# Altium PCB PCB1.PcbDoc
Units mil, origin at the board's own origin, x right, y up, seen from the top; angles counter-clockwise.
Board outline 6000 x 4000 mil, 2 copper layers (Top Layer, Bottom Layer); 36 components, 23 nets, 159 pads, 0 vias.
Unrouted connection lines stored in the file: 87.
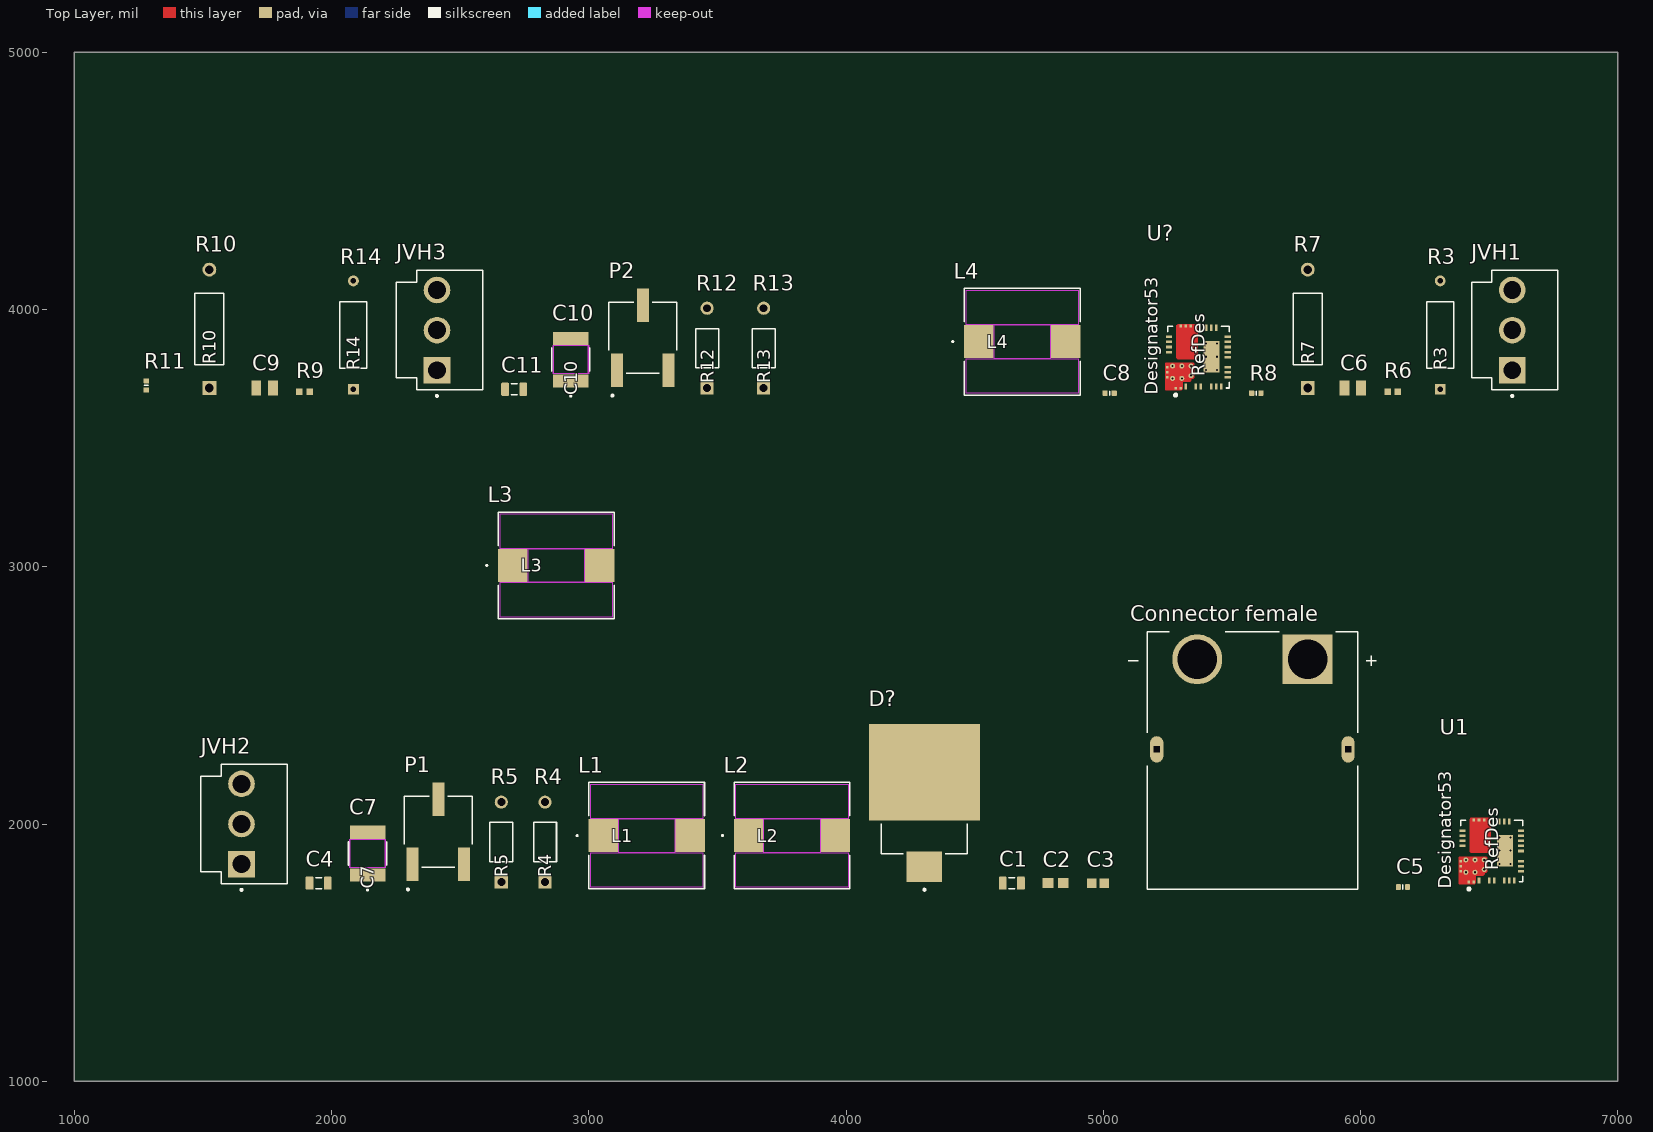
[diagram p0: Top Layer view]
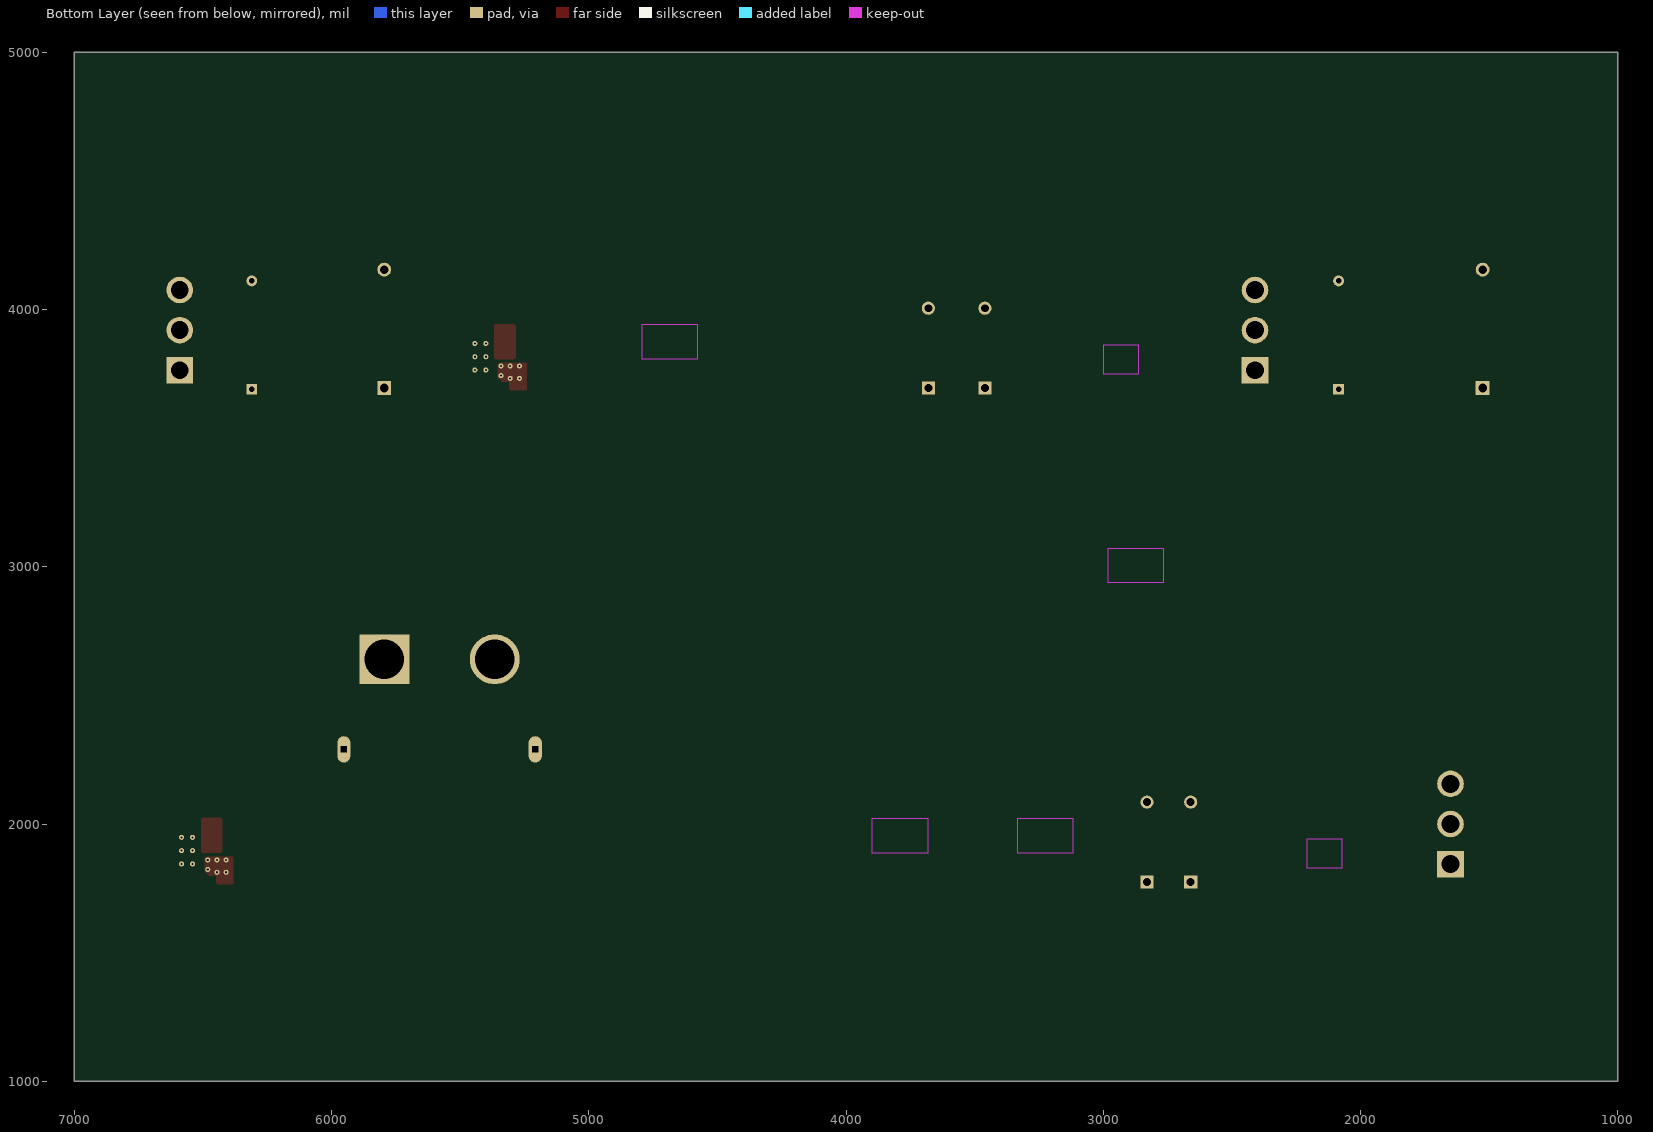
[diagram p1: Bottom Layer view, seen from below]

## Layer stack, top to bottom
Top Solder: solder mask 0.4, Solder Resist, Dk 3.5
Top Layer: signal copper 1.4
Dielectric 1: dielectric 12.6, FR-4, Dk 4.8
Bottom Layer: signal copper 1.4
Bottom Solder: solder mask 0.4, Solder Resist, Dk 3.5

## Board outline
1000,1000 7000,1000 7000,5000 1000,5000

## Design rules (kind name [scope] priority, off if disabled: settings)
Clearance [All] p1: gap=0.25 ignorepadtopadclearanceinfootprint=FALSE
PolygonConnect [All] p1: connectstyle=Relief reliefconductorwidth=10 reliefentries=4 polygonreliefangle="90 Angle" airgapwidth=10
RoutingVias [All] p1: holewidth=28 width=50 viastyle="Through Hole" minholewidth=28 minwidth=50 maxholewidth=28 maxwidth=50
SolderMaskExpansion [All] p1: expansion=4 istentingtop=FALSE
SupplyNets "Schematic Supply Nets" [InNet('GND')] p1: voltage=0.000
Width [All] p1: maxlimit=10 minlimit=10 preferedwidth=10
30 further rules are at their usual default settings.

## Components (designator, comment, footprint, x,y, rotation, side; value= is the part's Value field where it differs from the comment)
C1 "Capacitor 22µF +/-40% 16V 0805" CAPC0805(2012)145_L 4645,1770 r0 top value=22µF
C2 "Capacitor 1 uF +/- 10% 16 V 0603" CAPC1608X94X35NL15T15 4815,1770 r0 top value=1µF
C3 "Capacitor 100 nF +/-10% 50 V 0603" CAPC1608X90X40NL10T20 4980,1770 r0 top value=100nF
C4 "Capacitor 4.7µF +/-40% 25V 0805" CAPC0805(2012)145_L 1950,1770 r0 top value=4.7µF
C5 "Capacitor 47nF +/-20% 50V 0402" CAPC0402(1005)60_L 6165,1755 r0 top value=47nF
C6 "0.1uF" CAPC2012X145N 5970,3695 r0 top
C7 "9.3 uF" CAP_1812C_X7R_2S_50V_KEM 2140,1885 r90 top
C8 "Capacitor 47nF +/-20% 50V 0402" CAPC0402(1005)60_L 5025,3675 r0 top value=47nF
C9 "0.1uF" CAPC2012X145N 1740,3695 r0 top
C10 "9.3 uF" CAP_1812C_X7R_2S_50V_KEM 2930,3805 r90 top
C11 "Capacitor 4.7µF +/-40% 25V 0805" CAPC0805(2012)145_L 2710,3690 r0 top value=4.7µF
"Connector female" "XT90F-PW" AMASS_XT90PW-F 5580,2290 r0 top
D? "58.1 V 2800 W" TVSP_TLD8S36AH 4305,2150 r90 top
JVH1 "JST_VH-F" JST_B3P-VH(LF)(SN) 6590,3920 r90 top
JVH2 "JST_VH-F" JST_B3P-VH(LF)(SN) 1650,2000 r90 top
JVH3 "JST_VH-F" JST_B3P-VH(LF)(SN) 2410,3920 r90 top
L1 "6.8 uH" IND_IHLP-4040DZ_VIS 3225,1955 r0 top
L2 "6.8 uH" IND_IHLP-4040DZ_VIS 3790,1955 r0 top
L3 "6.8 uH" IND_IHLP-4040DZ_VIS 2873.5,3005 r0 top
L4 "6.8 uH" IND_IHLP-4040DZ_VIS 4685,3875 r0 top
P1 "50k" TRIM_3361P-1-503GLF 2415,1970 r90 top
P2 "50k" TRIM_3361P-1-503GLF 3210,3890 r90 top
R3 "6.81k" RES_MFR25_6P3X2P4_YAG 6310,3690 r90 top
R4 "27k" STA_CF18_STP 2830,1775 r90 top
R5 "0.008 k" STA_CF18_STP 2660,1775 r90 top
R6 "Resistor 100k +/-1% 0402 100 mW" RESC1005X40X25ML05T05 6125,3680 r0 top value=100k
R7 "41.2k" YAG_MF25_YAG 5795,3695 r90 top
R8 "Resistor 53K6 +/-1 % 0402 63 mW" RESC0402(1005)_L 5595,3675 r0 top value=53.6k
R9 "Resistor 100k +/-1% 0402 100 mW" RESC1005X40X25ML05T05 1895,3680 r0 top value=100k
R10 "41.2k" YAG_MF25_YAG 1525,3695 r90 top
R11 "Resistor 53K6 +/-1 % 0402 63 mW" RESC0402(1005)_L 1280,3705 r90 top value=53.6k
R12 "0.008 k" STA_CF18_STP 3460,3695 r90 top
R13 "27k" STA_CF18_STP 3680,3695 r90 top
R14 "6.81k" RES_MFR25_6P3X2P4_YAG 2085,3690 r90 top
U1 "LM70660RRXR" RRX0029B-MFG 6510,1895 r90 top
U? "LM70660RRXR" RRX0029B-MFG 5370,3815 r90 top

## Footprints (in the part's own frame and the unit in brackets; to place one, negate y for a bottom-side part, rotate by r counter-clockwise, add the part's x,y. Pads: shape width x height; smd on the part's side, far side on the other; paste and mask are expansions set on the pad)
AMASS_XT90PW-F [mm]
  round 4.916 hole 3.9: N(-5.45,8.9)
  rect 4.916x4.916 / inner round 4.916 / far side rect 4.916x4.916 hole 3.9: P(5.45,8.9)
  oval 1.3x2.6 hole 0.6 square: S1(9.45,0) S2(-9.45,0)
  silkscreen extent -12.25,-13.8 12.25,11.6, body extent -10.65,-13.8 10.65,11.6, height 10.3
CAP_1812C_X7R_2S_50V_KEM [mil]
  rect 51x138 smd paste+0 mask+0: 1(-83,0) 2(83,0)
  Top Layer keep-out region: -55.5,-67 -55.5,67 55.5,67 55.5,-67
  Keep-Out Layer region: -55.5,-69 -55.5,69 55.5,69 55.5,-69
  silkscreen extent -144,-74 45,74, body extent -94,-69 94,69, height 146
CAPC0402(1005)60_L [mm] "Chip Capacitor, Body 1.0x0.5mm, Height 0.6mm, IPC High Density"
  rrect25% 0.5x0.55 smd: 1(-0.45,0) 2(0.45,0)
  silkscreen extent 0,-0.2 0,0.2, body extent -0.5,-0.25 0.5,0.25, height 0.6
CAPC0805(2012)145_L [mm] "Chip Capacitor, Body 2.0x1.2mm, Height 1.45mm, IPC High Density"
  rrect25% 0.76x1.3 smd: 1(-0.9,0) 2(0.89,0)
  silkscreen extent -0.3,-0.55 0.3,0.55, body extent -1,-0.6 1,0.6, height 1.45
CAPC1608X90X40NL10T20 [mm] "Chip Capacitor, 2-Leads, Body 1.70x0.90mm, IPC Medium Density"
  rect 0.95x0.95 smd: 1(-0.625,0) 2(0.625,0)
  body extent -0.85,-0.45 0.85,0.45, height 0.9
CAPC1608X94X35NL15T15 [mm] "Chip Capacitor, 2-Leads, Body 1.75x0.96mm, IPC Medium Density"
  rect 1.05x1 smd: 1(-0.75,0) 2(0.75,0)
  body extent -0.87,-0.48 0.87,0.48, height 0.94
CAPC2012X145N [mm]
  rect 0.97x1.47 smd: 1(-0.83,0) 2(0.83,0)
  body extent -1,-0.63 1,0.63, height 1.45
IND_IHLP-4040DZ_VIS [mil]
  rect 115x128 smd paste+0 mask+0: 1(-168.5,0) 2(168.5,0)
  Top Layer keep-out region: -109,-66 -109,66 109,66 109,-66
  Top Layer keep-out region: -218,66 -218,200.5 218,200.5 218,66
  Top Layer keep-out region: -218,-200.5 -218,-66 218,-66 218,-200.5
  Keep-Out Layer region: -109,-66 -109,66 109,66 109,-66
  silkscreen extent -273,-208 225,208, body extent -220,-202 220,202, height 160
JST_B3P-VH(LF)(SN) [mm]
  rect 2.625x2.625 / inner round 2.625 / far side rect 2.625x2.625 hole 1.75: 1(-3.96,0)
  round 2.625 hole 1.75: 2(0,0) 3(3.96,0)
  silkscreen extent -6.6,-4.5 5.91,4, body extent -5.91,-4.5 5.91,4, height 10.9
RES_MFR25_6P3X2P4_YAG [mil]
  rect 42x42 hole 22 paste-99999 mask+0: 1(0,0)
  round 42 hole 22 paste-99999 mask+0: 2(421.26,0)
  silkscreen extent 82,-52 340,53, body extent -6,-47 427,47, height 95
RESC0402(1005)_L [mm] "Chip Resistor, Body 1.0x0.5mm, IPC High Density"
  rrect25% 0.5x0.55 smd: 1(-0.45,0) 2(0.45,0)
  silkscreen extent 0,-0.2 0,0.2, body extent -0.5,-0.25 0.5,0.25, height 0.3
RESC1005X40X25ML05T05 [mm] "Chip Resistor, 2-Leads, Body 1.05x0.55mm, IPC Low Density"
  rect 0.65x0.65 smd: 1(-0.5,0) 2(0.5,0)
  body extent -0.53,-0.28 0.53,0.28, height 0.4
RRX0029B-MFG [mm]
  rect 0.267x0.25 smd paste+0 mask-0.127: 1(-3.066,2.25) 2(-3.066,1.75)
  rect 0.6x0.25 smd paste+0 mask+0: 3(-2.9,1.25) 4(-2.9,0.25) 5(-2.9,-0.25) 6(-2.9,-1.25) 7(-2.9,-1.75) 8(-2.9,-2.25) 17(2.9,-1.75) 18(2.9,-1.25) 19(2.9,-0.75)
  rect 0.25x0.6 smd paste+0 mask+0: 9(-2,-2.9) 10(-1.5,-2.9) 11(-1,-2.9) 12(0,-2.9) 13(0.5,-2.9) 14(1,-2.9) 15(1.5,-2.9) 16(2,-2.9) 23(2,2.9) 24(1.5,2.9) 25(1,2.9) 26(0.5,2.9)
  rect 0.293x0.25 smd paste+0 mask-0.14: 20(3.054,0.75) 21(3.054,1.25) 22(3.054,1.75)
  rect 0.25x0.258 smd paste+0 mask-0.114: 27(-1,3.071) 28(-1.5,3.071) 29(-2,3.071)
  rect 3.125x1.584 smd paste-1.55 mask+0: 30(0.037,-1.308)
  round 0.5 / inner round 1.524 / far side round 0.5 hole 0.203 paste-2539.97 mask-0.241: 31(1.35,-0.766) 32(1.35,-1.85) 33(0.037,-0.766) 34(0.037,-1.85) 35(-1.275,-0.766) 36(-1.275,-1.85) 37(-2.1,2.55) 38(-2.1,1.642) 39(-1.834,0.734) 40(-0.875,0.734) 41(-0.875,1.642) 42(-0.875,2.55)
  Top Layer region: 3.154,2.17 -0.08,2.17 -0.195,2.055 -0.195,0.185 -0.08,0.07 3.154,0.07 3.27,0.185 3.27,2.055
  Top Layer region: -3.27,1.675 -3.27,3.22 -3.22,3.27 -0.605,3.27 -0.555,3.22 -0.555,0.534 -0.675,0.414 -2.034,0.414 -2.154,0.534 -2.154,0.641 -2.204,0.691 -2.3,0.691 -2.42,0.811 -2.42,1.505 -2.47,1.555 -3.15,1.555
  silkscreen extent -3.87,-3.05 3.05,3.05
STA_CF18_STP [mil]
  rect 51x51 hole 31 paste-99999 mask+0: 1(0,0)
  round 51 hole 31 paste-99999 mask+0: 2(310,0)
  silkscreen extent 79,-44 231,45, body extent -11,-39 321,39, height 79
TRIM_3361P-1-503GLF [mm]
  rect 3.3x1.19 smd: 1(-3.2,2.54) 2(3.2,0) 3(-3.2,-2.54)
  silkscreen extent -5.8,-3.35 3.52,3.35, body extent -4.27,-3.35 4.27,3.35, height 5.84
TVSP_TLD8S36AH [mm]
  rect 9.5x11 smd paste-7: A(1.3,0)
  rect 3x3.5 smd: C(-8.05,0)
  silkscreen extent -10.4,-4.25 -3.77,4.25, body extent -8.75,-5 6.75,5, height 5.5
YAG_MF25_YAG [mil]
  rect 54x54 hole 34 paste-99999 mask+0: 1(0,0)
  round 54 hole 34 paste-99999 mask+0: 2(460,0)
  silkscreen extent 91,-56 369,57, body extent -12,-51 472,51, height 103

## Part data
C1: library part CMP-001-00081-4, "Chip Capacitor, 22µF +/-40%, 16V, 0805, Thickness 1.45 mm", Case/Package=0805, Max Operating Temperature=85°C, Min Operating Temperature=-55°C, Tolerance=5%, Voltage Rating=16V, Mounting Technology=SMT, Pins=2
C2: library part CMP-001-00003-6, "Chip Capacitor, 1 uF, +/- 10%, 16 V, 0603 (1608 Metric)", Capacitor Type=Ceramic, Case/Package=0603, Max Operating Temperature=125°C, Min Operating Temperature=-55°C, Tolerance=10%, Voltage Rating=16V, Mounting Technology=SM, Pins=2, RoHS Compliant=True
C3: library part CMP-001-00017-6, "Chip Capacitor, 100 nF, +/- 10%, 50 V, 0603 (1608 Metric)", Capacitor Type=Ceramic, Case/Package=0603, Max Operating Temperature=125°C, Min Operating Temperature=-55°C, Tolerance=10%, Voltage Rating=50V, Mounting Technology=SM, Pins=2, RoHS Compliant=True
C4 C11: library part CMP-001-00080-4, "Chip Capacitor, 4.7µF +/-40%, 25V, 0805, Thickness 1.45 mm", Case/Package=0805, Max Operating Temperature=85°C, Min Operating Temperature=-55°C, Tolerance=20%, Voltage Rating=25V, Mounting Technology=SMT, Pins=2
C5 C8: library part CMP-001-00071-4, "Chip Capacitor, 47nF +/-20%, 50V, 0402, Thickness 0.6 mm", Case/Package=0402, Max Operating Temperature=85°C, Min Operating Temperature=-55°C, Tolerance=20%, Voltage Rating=50V, Mounting Technology=SMT, Pins=2
C6 C9: library part C2012X7R2A104K125AA, "Capacitor", Manufacturer_Name=TDK, Mouser Part Number=810-C2012X7R2A104K, Arrow Part Number=C2012X7R2A104K125AA, Arrow Price/Stock=https://www.arrow.com/en/products/c2012x7r2a104k125aa/tdk?region=europe, ClassName=PowerModul, Datasheet Link=https://product.tdk.com/info/en/catalog/datasheets/mlcc_commercial_midvoltage_en.pdf, Height=1.45mm, Manufacturer_Part_Number=C2012X7R2A104K125AA, Mouser Price/Stock=https://www.mouser.co.uk/ProductDetail/TDK/C2012X7R2A104K125AA?qs=NRhsANhppD9J0ZsT2%2Fo%2F7Q%3D%3D
C7 C10: library part CAP_1812C_X7R_2S_50V_KEM, "Capacitor 9.3 uF", ComponentLink1Description="Manufacturer Link", ComponentLink1URL=https://www.digikey.ca/en/products/detail/kemet/C1812C945K5RLCAUTO/13146940
D?: library part TVSP_TLD8S36AH, "Diode TVS 2800 W Unidirectionnelle", ComponentLink1Description="Manufacturer Link", ComponentLink1URL=https://www.digikey.ca/en/products/detail/taiwan-semiconductor-corporation/TLD5S36AH/9659228
L1 L2 L3 L4: library part IHLP4040DZER6R8M11, "Inductance 6.8uF 7.5V Isat", ComponentLink1Description="Manufacturer Link", ComponentLink1URL=https://www.digikey.ca/en/products/detail/vishay-dale/IHLP4040DZER6R8M11/1220708
P1 P2: library part TRIM_3361P-1-503GLF, "Potentiometer 50k ohms", ComponentLink1Description="Manufacturer Link", ComponentLink1URL=https://www.digikey.ca/en/products/detail/bourns-inc/3361P-1-503GLF/1088375
R3 R14: library part Resistor_6.81k, ComponentLink1Description=Link, ComponentLink1URL=https://www.digikey.ca/fr/products/detail/yageo/MFR-25FRF52-6K81/14969
R4 R13: library part STA_CF18_STP, "Resistor 27k ohms", ComponentLink1Description="Manufacturer Link", ComponentLink1URL=https://www.digikey.ca/en/models/1741656?tab=ultralibrarian
R5 R12: library part STA_CF18_STP_1, "Resistor 8 mOhms", ComponentLink1Description="Manufacturer Link", ComponentLink1URL=https://www.digikey.ca/en/products/detail/ohmite/14AFR008E/2003850
R6 R9: library part CMP-009-00022-5, "Chip Resistor, 100 KOhm, +/- 1%, 0.1 W, -55 to 155 degC, 0402 (1005 Metric)", Case/Package=0402, Max Operating Temperature=155°C, Min Operating Temperature=-55°C, Power=100mW, Tolerance=1%, Voltage Rating=50V, Mounting Technology=SM, Pins=2, RoHS Compliant=True
R7 R10: library part YAG_MF25_YAG, "Resistor 41.2k Through Hole", ComponentLink1Description="Manufacturer Link", ComponentLink1URL=https://www.digikey.ca/fr/products/detail/yageo/MFR-25FBF52-41K2/13398
R8 R11: library part CMP-009-00124-3, "Chip Resistor, 53,6 kOhms, +/-1 %, 63 mW, -55 to 155 degC, 0402", Case/Package=0402, Max Operating Temperature=155°C, Min Operating Temperature=-55°C, Power=63mW, Tolerance=1%, Pins=2
U1 U?: "High-density, 4.5V to 65V input, 6A low-EMI synchronous DC/DC step-down converter 29-VQFN -40 to 150", Manufacturer_Name="Texas Instruments", Copyright="Copyright (C) 2025 Ultra Librarian. All rights reserved.", Manufacturer_Part_Number=LM70660RRXR, RefDes=RefDes, Type=TYPE

## Nets (pads, with @x,y where several pads share a name; then routed paths per layer and width w, separated by ;. In a path a pad name is that pad's centre, name@x,y a point inside that pad or via, vN(x,y) a via of type N, cw(c..) or ccw(c..) an arc to the next point about the centre after c; other vN are vias at no path point)
GND: "Connector female.N" C1.1 C2.1 C3.1 C4.1 C6.2 C7.1 C9.2 C10.1 C11.1 D?.C JVH1.2 JVH2.2 JVH3.2 R3.1 R7.1 R8.2 R10.1 R11.2 R14.1 U1.8 U1.17 U1.23 U1.24 U1.25 U1.26 U1.30 U?.8 U?.17 U?.23 U?.24 U?.25 U?.26 U?.30
NetC1_2: "Connector female.P" C1.2 C2.2 C3.2 D?.A U1.1 U1.2 U1.3 U1.9 U1.27 U1.28 U1.29 U?.1 U?.2 U?.3 U?.9 U?.27 U?.28 U?.29
NetC4_2: C4.2 U1.19
NetC5_1: C5.1 U1.4
NetC5_2: C5.2 L1.2 U1.5 U1.20 U1.21 U1.22
NetC6_1: C6.1 R6.1 R8.1 U1.14 U1.18
NetC7_2: C7.2 JVH1.1 JVH2.1 L2.1
NetC8_1: C8.1 U?.4
NetC8_2: C8.2 L3.2 U?.5 U?.20 U?.21 U?.22
NetC9_1: C9.1 P2.1 R9.1 R11.1 R14.2 U?.14 U?.16 U?.18
NetC10_2: C10.2 JVH3.1 L4.1
NetC11_2: C11.2 U?.19
NetL1_1: L1.1 R5.1 U1.11
NetL2_2: L2.2 P1.3 R4.2
NetL3_1: L3.1 R12.1 U?.11
NetL4_2: L4.2 P2.3 R13.2
NetP1_1: P1.1 R3.2 U1.16
NetR4_1: R4.1 R5.2 U1.12
NetR6_2: R6.2 U1.15
NetR7_2: R7.2 U1.13
NetR9_2: R9.2 U?.15
NetR10_2: R10.2 U?.13
NetR12_2: R12.2 R13.1 U?.12
pads on no net: "Connector female.S1" "Connector female.S2" JVH1.3 JVH2.3 JVH3.3 P1.2 P2.2 U1.6 U1.7 U1.10 U1.31 U1.32 U1.33 U1.34 U1.35 U1.36 U1.37 U1.38 U1.39 U1.40 U1.41 U1.42 U?.6 U?.7 U?.10 U?.31 U?.32 U?.33 U?.34 U?.35 U?.36 U?.37 U?.38 U?.39 U?.40 U?.41 U?.42

## Text inside footprints (layer, text, board x,y; h text height)
U1: Top Overlay "RefDes" at 6535,1820 h50 r90; Top Overlay "Designator53" at 6352,1748 h50 r90
U?: Top Overlay "RefDes" at 5395,3740 h50 r90; Top Overlay "Designator53" at 5212,3668 h50 r90